# Altium PCB CH32V003F4P6_Dev_Kit_DIY_V1.0.PcbDoc
Units mm, origin at the board's own origin, x right, y up, seen from the top; angles counter-clockwise.
Board outline 152.4 x 101.6 mm, 2 copper layers (Top Layer, Bottom Layer); 15 components, 24 nets, 93 pads, 0 vias.
Unrouted connection lines stored in the file: 65.
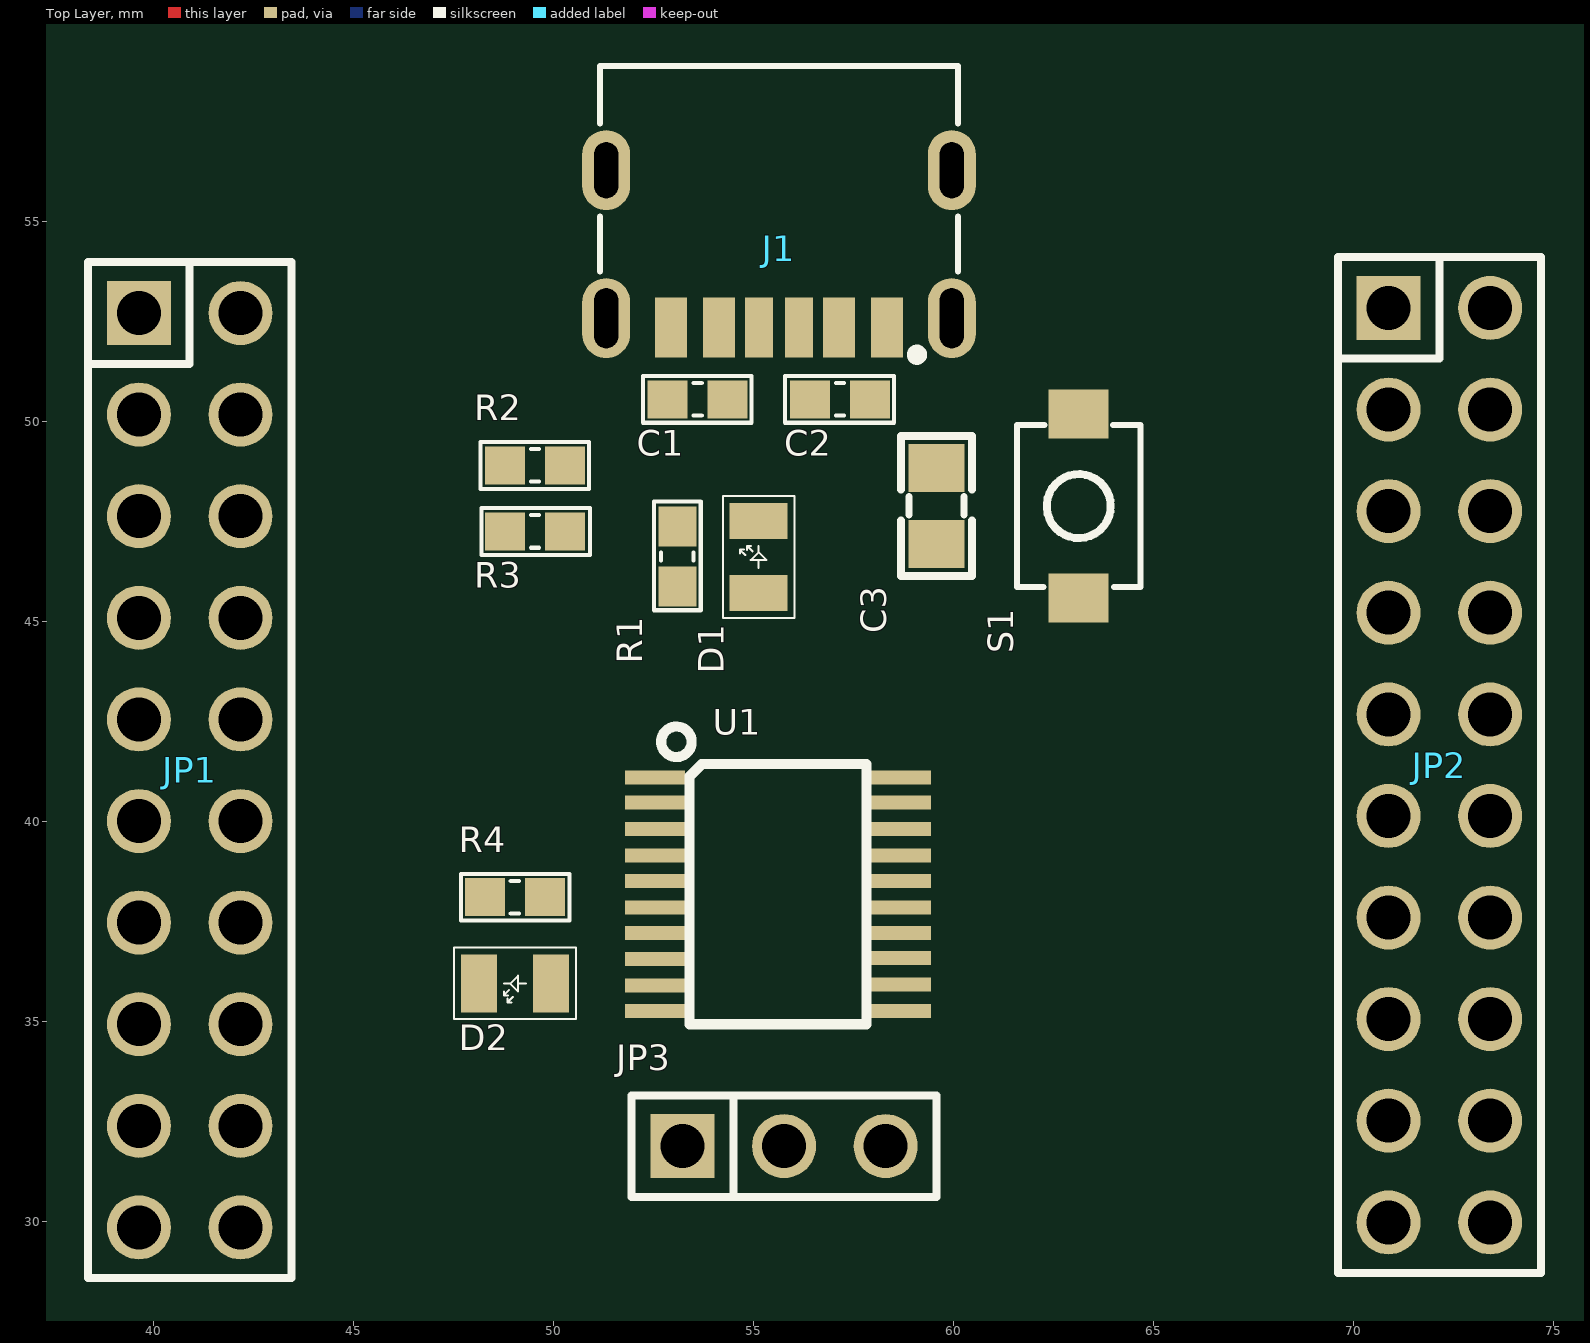
[diagram p0: Top Layer view]
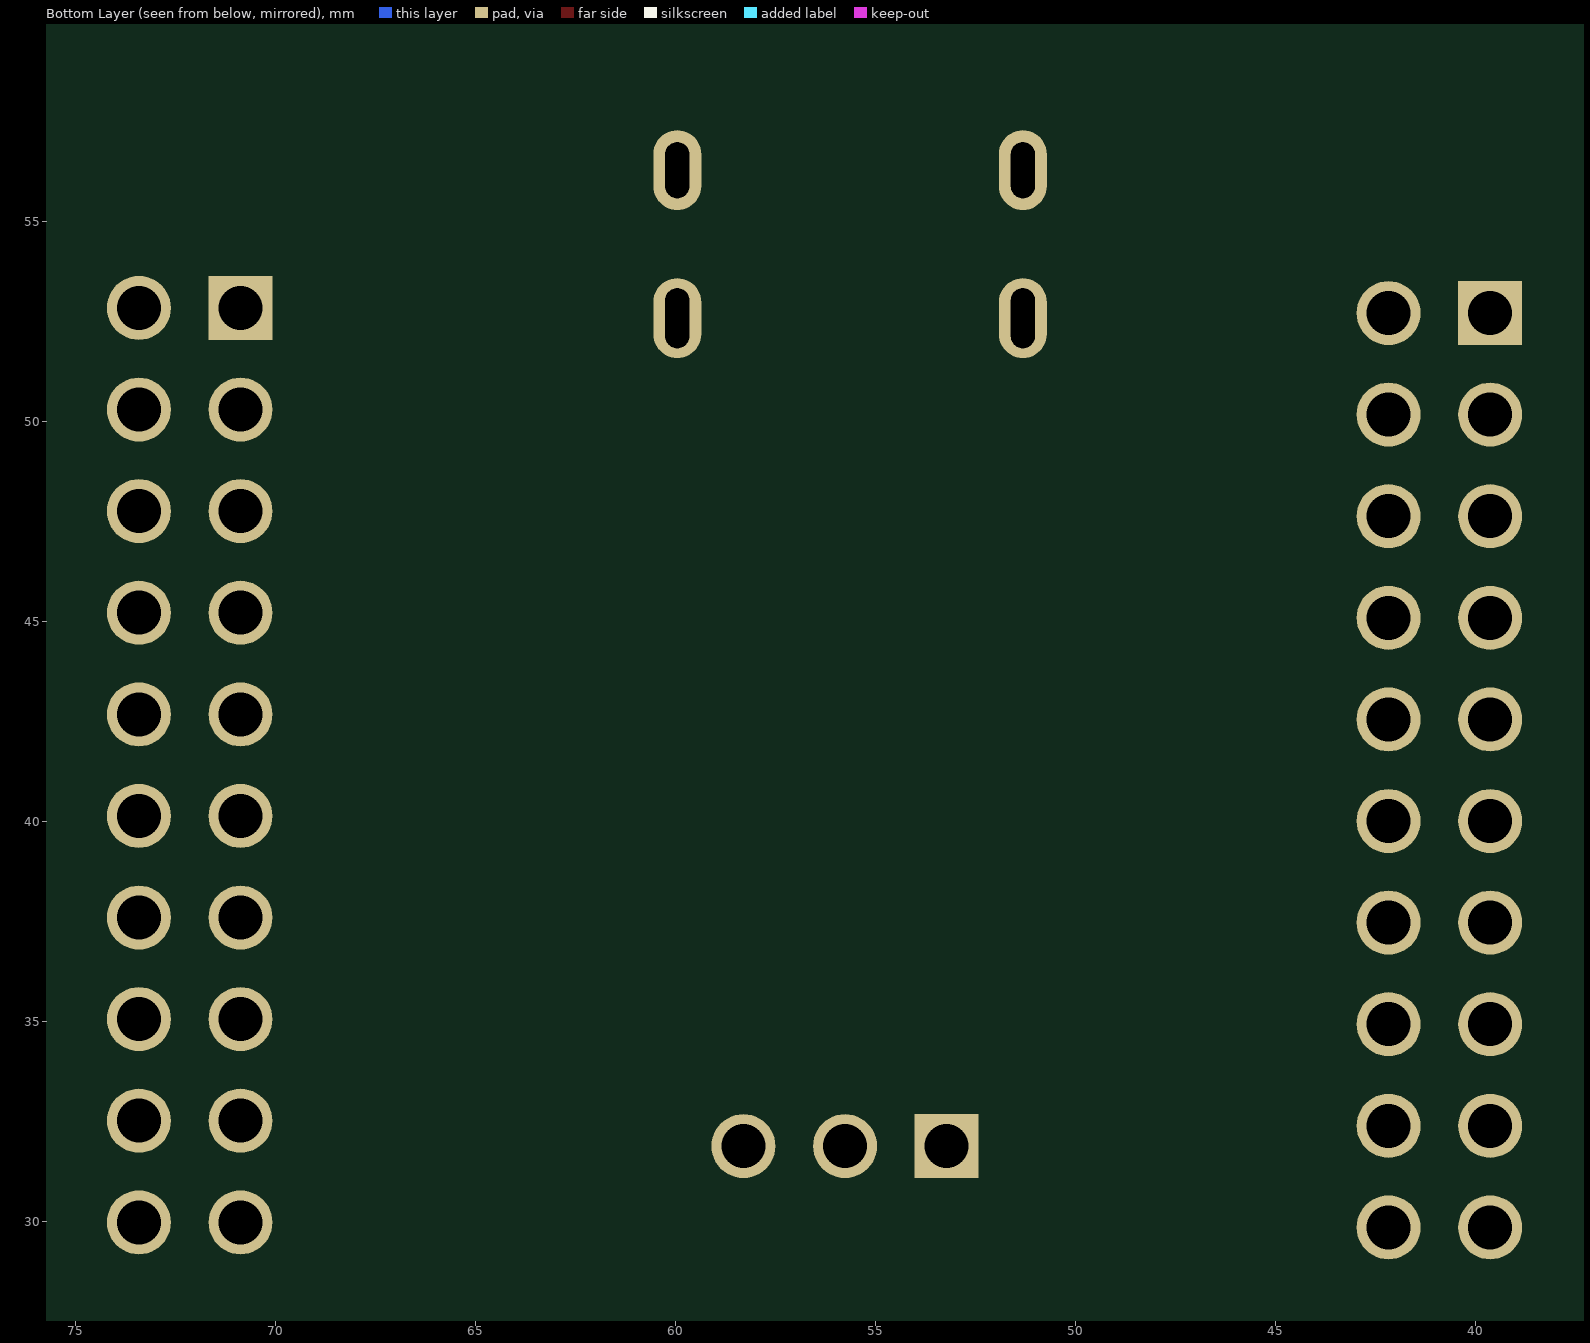
[diagram p1: Bottom Layer view, seen from below]

## Layer stack, top to bottom
Top Solder: solder mask 0.0102, Solder Resist, Dk 3.5
Top Layer: signal copper 0.0356
Dielectric 1: dielectric 0.32, FR-4, Dk 4.8
Bottom Layer: signal copper 0.0356
Bottom Solder: solder mask 0.0102, Solder Resist, Dk 3.5

## Board outline
25.4,25.4 177.8,25.4 177.8,127 25.4,127

## Design rules (kind name [scope] priority, off if disabled: settings)
Clearance [All] p1: gap=0.2 ignorepadtopadclearanceinfootprint=FALSE
PolygonConnect [All] p1: connectstyle=Relief reliefconductorwidth=0.254 reliefentries=4 polygonreliefangle="90 Angle" airgapwidth=0.254
RoutingVias [All] p1: holewidth=0.711 width=1.27 viastyle="Through Hole" minholewidth=0.711 minwidth=1.27 maxholewidth=0.711 maxwidth=1.27
SolderMaskExpansion [All] p1: expansion=0.102 istentingtop=FALSE
Width [All] p1: maxlimit=0.254 minlimit=0.254 preferedwidth=0.254
30 further rules are at their usual default settings.

## Components (designator, comment, footprint, x,y, rotation, side; value= is the part's Value field where it differs from the comment)
C1 "104" "tu 0603" 53.594,50.546 r180 top
C2 "104" "tu 0603" 57.15,50.546 r180 top
C3 "0.1uF" "tu 0805" 59.563,47.879 r90 top
D1 "LED_0805_RED" LED_0805_RED 55.118,46.609 r0 top
D2 "LED_0805_BLUE" LED_0805_BLUE 49.022,35.941 r90 top
J1 "USB TPYE C - 6p" USB-TYPE-C_TYPEC-6PIN-EH_FP 55.626,55.245 r180 top
JP1 "JP 2x10 2.54" "JP 2x10 DT" 40.894,41.275 r270 top
JP2 "JP 2x10 2.54" "JP 2x10 DT" 72.136,41.402 r270 top
JP3 "JP 1x3 2.54" "JP 1x3 DT" 53.213,31.877 r0 top
R1 "330" "tro smd 0603" 53.086,46.621 r90 top
R2 "NC(5.1K)" "TRO SMD 0603 - duplicate" 49.53,48.895 r180 top
R3 "NC(5.1K)" "TRO SMD 0603 - duplicate" 49.53,47.244 r0 top
R4 "330" "tro smd 0603" 49.022,38.1 r0 top
S1 "PUSH_BUTTON_SMD_3X4X2" PUSH_BUTTON_SMD_3X4X2 63.119,47.879 r90 top
U1 "CH32V003F4P6" CH32V003F4P6 57.862,41.533 r270 top

## Footprints (in the part's own frame and the unit in brackets; to place one, negate y for a bottom-side part, rotate by r counter-clockwise, add the part's x,y. Pads: shape width x height; smd on the part's side, far side on the other; paste and mask are expansions set on the pad)
CH32V003F4P6 [mm]
  rect 0.351x1.501 smd paste+0 mask+0.051: 1(0.435,-5.334) 2(1.07,-5.334) 3(1.731,-5.334) 4(2.391,-5.334) 5(3.026,-5.334) 6(3.687,-5.334) 7(4.322,-5.334) 8(4.982,-5.334) 9(5.642,-5.334) 10(6.277,-5.334) 11(6.277,0.812) 12(5.617,0.812) 13(4.957,0.812) 14(4.322,0.812) 15(3.687,0.812) 16(3.026,0.812) 17(2.391,0.812) 18(1.731,0.812) 19(1.07,0.812) 20(0.435,0.812)
  silkscreen extent -0.83,-5.18 6.61,-0.05, body extent 0.05,-5.59 6.65,0.96, height 1.2
"JP 1x3 DT" [mm]
  rect 1.6x1.6 hole 1.1: 1(0,0)
  round 1.6 hole 1.1: 2(2.54,0) 3(5.08,0)
  silkscreen extent -1.27,-1.27 6.35,1.27, body extent -1.27,-1.27 6.35,1.27, height 8.54
"JP 2x10 DT" [mm] "20 pins, dual pin, straight, gold plating"
  rect 1.6x1.6 hole 1.1: 1(-11.43,-1.27)
  round 1.6 hole 1.1: 2(-8.89,-1.27) 3(-6.35,-1.27) 4(-3.81,-1.27) 5(-1.27,-1.27) 6(1.27,-1.27) 7(3.81,-1.27) 8(6.35,-1.27) 9(8.89,-1.27) 10(11.43,-1.27) 11(11.43,1.27) 12(8.89,1.27) 13(6.35,1.27) 14(3.81,1.27) 15(1.27,1.27) 16(-1.27,1.27) 17(-3.81,1.27) 18(-6.35,1.27) 19(-8.89,1.27) 20(-11.43,1.27)
  silkscreen extent -12.7,-2.54 12.7,2.54, body extent -12.7,-2.54 12.7,2.54, height 8.55
LED_0805_BLUE [mm]
  rect 1.45x0.9 smd: 1(0,-0.9) 2(0,0.9)
  silkscreen extent -0.89,-1.53 0.9,1.52, body extent -0.62,-1.02 0.63,0.98, height 1.1
LED_0805_RED [mm]
  rect 1.45x0.9 smd: 1(0,-0.9) 2(0,0.9)
  silkscreen extent -0.89,-1.53 0.9,1.52, body extent -0.62,-1.02 0.63,0.98, height 1.1
PUSH_BUTTON_SMD_3X4X2 [mm]
  rect 1.23x1.5 smd: 1(-2.3,0) 2(2.3,0)
  silkscreen extent -2.03,-1.54 2.03,1.54, body extent -2.49,-1.45 2.51,1.45, height 2
"tro smd 0603" [mm] "Chip Capacitor, 2-Leads, Body 1,60x0,80mm, IPC Medium Density"
  rect 1x0.95 smd mask+0.076: 1(-0.75,0) 2(0.75,0)
  silkscreen extent -1.35,-0.58 1.37,0.58, body extent -0.82,-0.42 0.82,0.43, height 0.44
"TRO SMD 0603 - duplicate" [mm] "Chip Capacitor, 2-Leads, Body 1,60x0,80mm, IPC Medium Density"
  rect 1x0.95 smd mask+0.076: 1(-0.75,0) 2(0.75,0)
  silkscreen extent -1.35,-0.58 1.37,0.58
"tu 0603" [mm] "Chip Capacitor, 2-Leads, Body 1,60x0,80mm, IPC Medium Density"
  rect 1x0.95 smd mask+0.076: 1(-0.75,0) 2(0.75,0)
  silkscreen extent -1.35,-0.58 1.37,0.58, body extent -0.8,-0.4 0.8,0.4, height 0.9
"tu 0805" [mm] "Compoment SMD 80x50mil"
  rect 1.2x1.4 smd: 1(-0.946,-0.003) 2(0.954,-0.003)
  silkscreen extent -1.75,-0.89 1.75,0.89, body extent -1.01,-0.64 1.01,0.63, height 0.61
USB-TYPE-C_TYPEC-6PIN-EH_FP [mm]
  rect 0.8x1.5 smd paste-100 mask+0.05: 1(-2.7,2.896) 2(-1.5,2.896) 5(1.5,2.896) 6(2.7,2.896)
  rect 0.7x1.5 smd paste-100 mask+0.05: 3(-0.5,2.896) 4(0.5,2.896)
  oval 1.2x2 hole 0.6 slot 1.4 at 90 deg paste-2539.97 mask+0.05: 7(-4.32,-1.033) 7(4.32,-1.033)
  oval 1.2x2 hole 0.6 slot 1.5 at 90 deg paste-2539.97 mask+0.05: 7(-4.32,2.667) 7(4.32,2.667)
  silkscreen extent -4.48,-3.63 4.47,3.71, body extent -4.47,-3.63 4.47,3.74, height 3.26

## Part data
C1 C2: library part "Tu 0603 104 50V 10%", "Dán", Chung_Loai=Dán, Don_Vi=Con, Ma_Hang=MH004568, So_Chan=2, Ten_Linh_Kien="Tụ 0603 104-100nF 10% 50V"
C3: library part "Tu 0805 101 50V 20%", "Dán", Chung_Loai=Dán, Don_Vi=Con, Ma_Hang=MH002806, So_Chan=2, Ten_Linh_Kien="Tụ 0805 101-0.1nF 50V 20%"
D1: "LED 0805 Red.", JLCPCB PN=C113551
D2: "LED 0805 Blue.", JLCPCB PN=C131208
JP1 JP2: library part "JP 2x10 2.54 Duc Thang", "Cắm", Chung_Loai=Cắm, Don_Vi=Con, Ma_Hang=MH002686, Ten_Linh_Kien="Jump Đôi Đực 2.54MM 2x40P Thẳng 11MM"
JP3: library part "JP 1x3 2.54 Duc Thang", "Cắm", Chung_Loai=Cắm, Don_Vi=Con, Ma_Hang=MH000903, Ten_Linh_Kien="Jump Đơn Đực 2.54MM 1x40P Thẳng 11MM"
R1 R2 R3 R4: library part "Tro 0603 1% 1k", "Dán", Chung_Loai=Dán, Don_Vi=Con, Ma_Hang=MH006334, So_Chan=2, Ten_Linh_Kien="Trở 0603 1% 1k"
S1: "Push Button Tactile Switch SMD 2 Pins 3x4x2mm.", JLCPCB PN=C231644
U1: library part CH32V003F4P6_1, "RISC-V MCU, 48MHz"

## Nets (pads, with @x,y where several pads share a name; then routed paths per layer and width w, separated by ;. In a path a pad name is that pad's centre, name@x,y a point inside that pad or via, vN(x,y) a via of type N, cw(c..) or ccw(c..) an arc to the next point about the centre after c; other vN are vias at no path point)
5V: C1.1 C2.2 J1.2 J1.5 JP1.9 JP1.12 JP3.1 R1.2 R4.2 U1.9
DATA: JP2.3 JP2.18 JP3.2 U1.18
GND: C1.2 C2.1 C3.2 D1.2 J1.1 J1.6 JP1.10 JP1.11 JP3.3 R2.1 R3.1 S1.2 U1.7
NetD1_1: D1.1 R1.1
NetD2_1: D2.1 R4.1
NetJ1_3: J1.3 R2.2
NetJ1_4: J1.4 R3.2
NRST: C3.1 JP1.4 JP1.17 S1.1 U1.4
PA1: JP1.5 JP1.16 U1.5
PA2: JP1.6 JP1.15 U1.6
PC0: D2.2 JP1.8 JP1.13 U1.10
PC1: JP2.10 JP2.11 U1.11
PC2: JP2.9 JP2.12 U1.12
PC3: JP2.8 JP2.13 U1.13
PC4: JP2.7 JP2.14 U1.14
PC5: JP2.6 JP2.15 U1.15
PC6: JP2.5 JP2.16 U1.16
PC7: JP2.4 JP2.17 U1.17
PD0: JP1.7 JP1.14 U1.8
PD2: JP2.2 JP2.19 U1.19
PD3: JP2.1 JP2.20 U1.20
PD4: JP1.1 JP1.20 U1.1
PD5: JP1.2 JP1.19 U1.2
PD6: JP1.3 JP1.18 U1.3
pads on no net: J1.7